# EAGLE board Y-babies -- PicAxe (EAGLE 6.5.0)
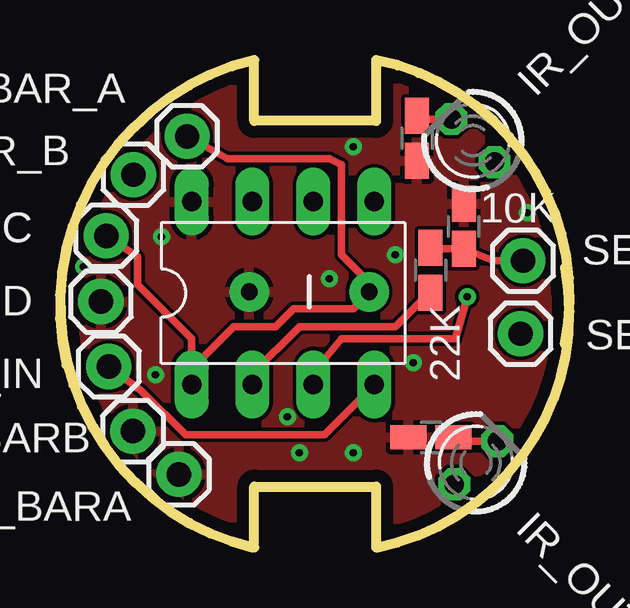
[diagram p0: board, top side]
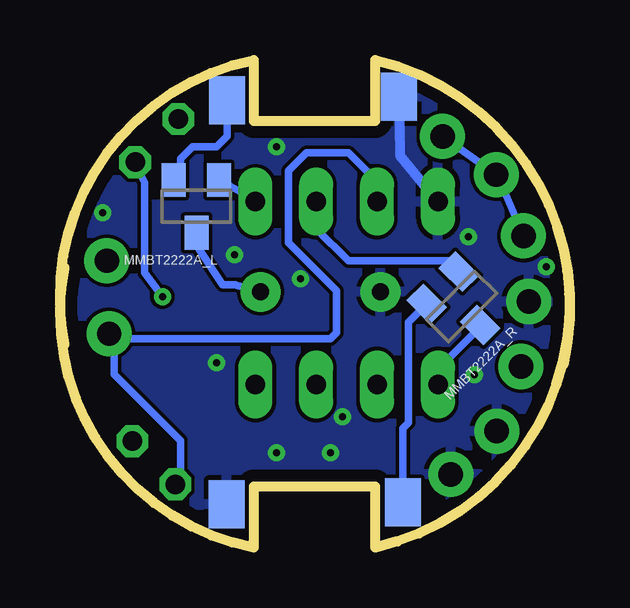
[diagram p1: board, bottom side, seen from below]

Size 21.26 x 20.32 mm. Coordinates in mm from the lower left corner, seen from the top.
Outline: 0.27,7.62 arc-90 8.1,20.32 8.1,17.78 13.18,17.78 13.18,20.32 arc-90 21.06,8.46
Outline: 0.27,12.48 arc90 8.1,0 8.1,2.54 13.18,2.54 13.18,0 arc90 21.07,11.66
Copper layers (1*16): Top 0.035mm / dielectric 1.5mm / Bottom 0.035mm
Design rules "default *": minimum track width 10mil, minimum drill 24mil, track to track 6mil, track to pad 6mil, pad to pad 6mil, via to via 6mil, smd to smd 6mil, copper to edge 20mil, drill to drill 6mil, minimum pad ring 10mil, minimum via ring 8mil, stop-mask expansion 4mil, vias tented up to drill 0.3mm, thermal gap 8mil

## Footprints (pad centres in the part's own frame; a part is rotated, then mirrored left to right if it is on the bottom)
R0805W = smd 1.5 x 1: 1 -0.94,0; 2 0.94,0
CAP-PTH-5MM = drill 0.7 pad 1.651: 1 -2.5,0; 2 2.5,0
1X01 = drill 1.016 pad 1.88: 1 0,0
LED3MM = drill 0.813 octagon: A -1.27,0; K 1.27,0
SOT23 = smd 1 x 1.4: 1 -0.95,-1.1; 2 0.95,-1.1; 3 0,1.1
PAD-1.5X4.5 = smd 1.5 x 2: P$1 0,0
DIL8 = drill 0.813 pad 1.422 long: 1 -3.81,-3.81; 2 -1.27,-3.81; 3 1.27,-3.81; 4 3.81,-3.81; 5 3.81,3.81; 6 1.27,3.81; 7 -1.27,3.81; 8 -3.81,3.81

## Placement (x,y rotation side)
10K  [R0805W]  16.84,13.39 90 top
22K  [R0805W]  15.46,11.56 90 top
C1  [CAP-PTH-5MM]  10.39,10.66 0 top
GND  M01PTH  [1X01]  1.71,10.26 0 top
GND_BARA  M01PTH  [1X01]  4.96,3.05 0 top
GND_BARB  M01PTH  [1X01]  3.04,4.86 0 top
IR_IN  M01PTH  [1X01]  2.04,7.55 0 top
IR_OUT_A  [LED3MM]  17.22,16.96 135 top
IR_OUT_B  [LED3MM]  17.34,3.54 45 top
MMBT2222A_L  [SOT23]  15.57,14.22 180 bottom
MMBT2222A_R  [SOT23]  4.51,10.05 225 bottom
MOT_1_A  M01SMD-4.5X1.5  [PAD-1.5X4.5]  7.12,18.78 0 bottom
MOT_1_B  M01SMD-4.5X1.5  [PAD-1.5X4.5]  14.29,18.65 180 bottom
MOT_2_A  M01SMD-4.5X1.5  [PAD-1.5X4.5]  6.96,1.89 180 bottom
MOT_2_B  M01SMD-4.5X1.5  [PAD-1.5X4.5]  14.31,1.81 0 bottom
R1  [R0805W]  14.89,17.06 270 top
R2  [R0805W]  15.48,4.6 180 top
SER_IN  M01PTH  [1X01]  19.31,11.96 0 top
SER_OUT  M01PTH  [1X01]  19.21,8.92 0 top
U$1  PICAXE-08M  [DIL8]  9.3,10.61 0 top
VCC  M01PTH  [1X01]  1.93,12.99 0 top
VCC_BAR_A  M01PTH  [1X01]  5.3,17.14 0 top
VCC_BAR_B  M01PTH  [1X01]  3.06,15.54 0 top

## Library data of the parts
10K 22K R1 R2 = resistor
C1 GND GND_BARA GND_BARB IR_IN MMBT2222A_L MMBT2222A_R MOT_1_A MOT_1_B MOT_2_A MOT_2_B SER_IN SER_OUT VCC VCC_BAR_A VCC_BAR_B = SparkFun
IR_OUT_A IR_OUT_B = led
U$1 = picaxe-3

## Nets
GND: 10K.2 C1.1 GND.1 GND_BARA.1 GND_BARB.1 MOT_1_A.P$1 MOT_2_B.P$1 R1.2 R2.2 U$1.8
N$1: MMBT2222A_L.1 U$1.5
N$2: MMBT2222A_R.1 U$1.6
N$3: IR_OUT_B.A SER_OUT.1 U$1.7
N$4: IR_OUT_B.K R2.1
N$5: 10K.1 22K.2 SER_IN.1
N$6: IR_OUT_A.A U$1.3
N$7: IR_OUT_A.K R1.1
N$8: 22K.1 U$1.2
N$9: MMBT2222A_L.2 MOT_1_B.P$1
N$10: MMBT2222A_R.2 MOT_2_A.P$1
N$11: IR_IN.1 U$1.4
VCC: C1.2 MMBT2222A_L.3 MMBT2222A_R.3 U$1.1 VCC.1 VCC_BAR_A.1 VCC_BAR_B.1

## Tracks (layer width: path | path; a pad name or v marks a point on that pad's centre or on a via)
GND  (via drill 0.3)
  Bottom 0.406: MOT_1_A.P$1 7.08,16.35 U$1.8
  other vias: 9.98,3.96 0.98,11.71 14.73,7.71 12.23,16.71 19.48,13.96 4.23,12.96 13.98,12.21 11.23,11.21 9.48,5.46 12.23,3.96 3.98,7.21
  pour Bottom: -0.79,20.32 -0.79,0 22.07,0 22.07,20.32
  pour Top: -0.79,20.32 -0.79,0 22.07,0 22.07,20.32
N$1
  Bottom 0.305: MMBT2222A_L.1 13.71,14.81 U$1.5
N$2
  Bottom 0.305: U$1.6 10.57,13.3 9.23,11.96 5.08,11.96 MMBT2222A_R.1
N$3
  Bottom 0.305: U$1.7 8.03,15.26 9.23,16.46 10.98,16.46 11.73,15.71 11.73,12.71 9.73,10.71 9.73,8.96 9.98,8.71 19,8.71 | 19,8.71 SER_OUT.1 | 19,8.71 19,7.23 16.23,4.46 16.23,2.85 IR_OUT_B.A
N$4
  Top 0.305: IR_OUT_B.K 16.58,4.44 R2.1
N$5
  Top 0.305: SER_IN.1 18.08,11.95 10K.1 15.51,12.45 22K.2
N$6  (via drill 0.3)
  Top 0.305: U$1.3 10.57,7.3 11.73,8.71 16.48,8.71 v16.98,10.46
  Bottom 0.305: v16.98,10.46 17.73,11.46 17.73,15.2 IR_OUT_A.A
N$7
  Top 0.305: IR_OUT_A.K 15.03,17.86 R1.1
N$8
  Top 0.305: U$1.2 8.03,7.26 9.98,9.21 13.98,9.21 15.23,10.46 15.3,10.46 22K.1
N$9
  Bottom 0.305: MOT_1_B.P$1 14.29,17.15 14.73,16.71 15.73,16.71 16.23,16.21 16.23,15.61 MMBT2222A_L.2
N$10
  Bottom 0.305: MOT_2_A.P$1 6.96,4.99 6.73,5.21 6.73,9.39 MMBT2222A_R.2
N$11
  Top 0.305: IR_IN.1 3.39,6.55 5.23,4.71 11.02,4.71 U$1.4
VCC
  Top 0.305: U$1.1 5.49,8.7 3.23,10.96 3.23,12.11 VCC.1 | 12.98,10.71 12.98,10.96 11.73,12.21 11.73,15.96 11.23,16.21 6.98,16.21 VCC_BAR_A.1 | 5.48,6.96 5.48,7.46 7.23,9.21 8.98,9.21 9.73,9.96 12.23,9.96 12.98,10.71 | 12.98,10.71 12.94,10.71 C1.2
  Bottom 0.305: MMBT2222A_L.3 15.45,12.43 14.48,10.96 13.98,10.96 | 13.98,10.96 13.94,10.96 | C1.2 12.93,10.66 13.98,10.96 | VCC_BAR_A.1 VCC_BAR_B.1 2.73,14.84 VCC.1 | MMBT2222A_R.3 3.74,9.2 5.48,7.46 U$1.1